# EAGLE board TSOC_PSoC4L_R0_0 (EAGLE 6.6.0)
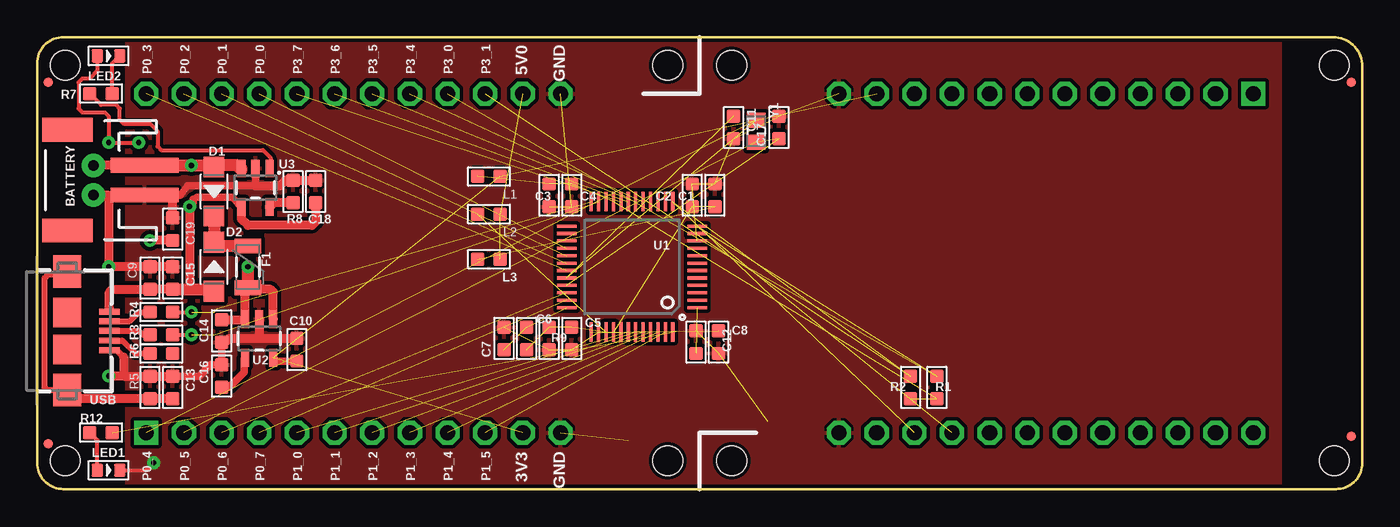
[diagram p0: board, top side]
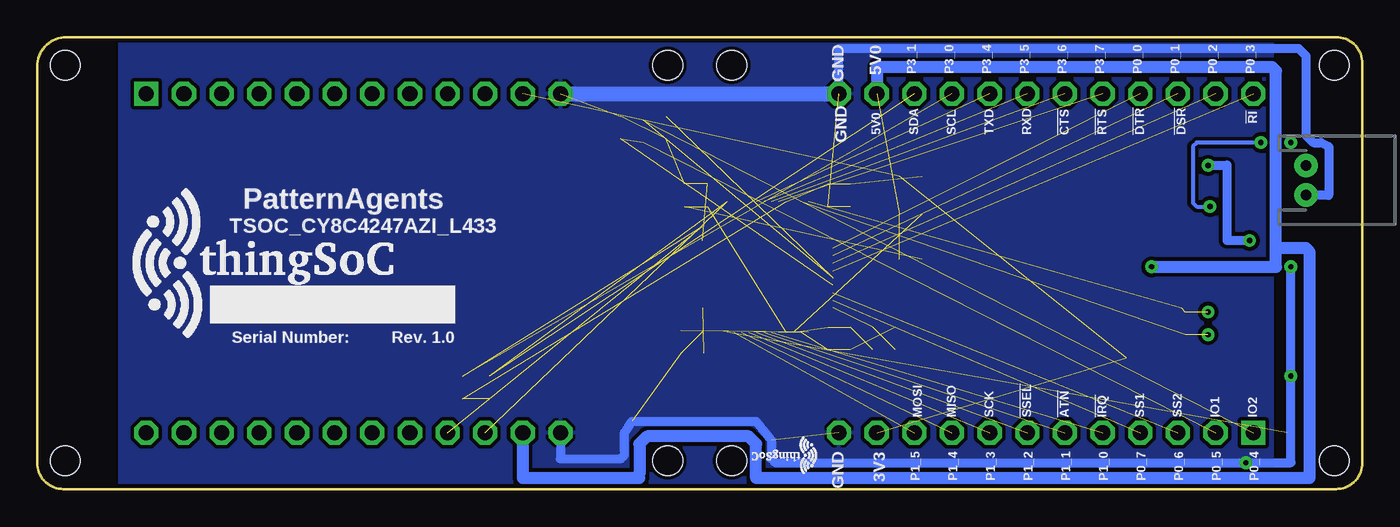
[diagram p1: board, bottom side, seen from below]

Size 89.41 x 30.48 mm. Coordinates in mm from the lower left corner, seen from the top.
Copper layers (1*16): Top 0.035mm / dielectric 1.5mm / Bottom 0.035mm
Design rules "PatternAgents_7mil": minimum track width 7mil, minimum drill 14mil, track to track 7mil, track to pad 7mil, pad to pad 7mil, via to via 7mil, smd to smd 7mil, copper to edge 7mil, drill to drill 7mil, minimum pad ring 12mil, minimum via ring 10mil, stop-mask expansion 4mil, vias tented up to drill 25mil, thermal gap 7mil
Net classes: 1 vcc: width 0.254 mm

## Footprints (pad centres in the part's own frame; a part is rotated, then mirrored left to right if it is on the bottom)
TSOC-BB-S24 = drill 1.016 square: 1B -11.43,11.43 | drill 1.016 octagon: 1C 11.43,11.43; 2B -11.43,8.89; 2C 11.43,8.89; 3B -11.43,6.35; 3C 11.43,6.35; 4B -11.43,3.81; 4C 11.43,3.81; 5B -11.43,1.27; 5C 11.43,1.27; 6B -11.43,-1.27; 6C 11.43,-1.27; 7B -11.43,-3.81; 7C 11.43,-3.81; 8B -11.43,-6.35; 8C 11.43,-6.35; 9B -11.43,-8.89; 9C 11.43,-8.89; 10B -11.43,-11.43; 10C 11.43,-11.43; 11B -11.43,-13.97; 11C 11.43,-13.97; 12B -11.43,-16.51; 12C 11.43,-16.51
JST-2-SMD = smd 1 x 4.6: 1 -1,-3.7; 2 1,-3.7 | smd 1.6 x 3.4: NC1 -3.4,1.5; NC2 3.4,1.5
C0603 = smd 0.889 x 0.889: 1 0,0.762; 2 0,-0.762
SOD-123 = smd 1.397 x 1.397: + -1.651,0; - 1.651,0
PTC-1206 = smd 1 x 1.8: 1 -1.4,0; 2 1.4,0
MICRO-FIDUCIAL = smd 0.635 x 0.635: 1 0,0
JST-2-PTH-NS = drill 0.7 pad 1.6: 1 -1,0; 2 1,0
L0603 = smd 0.889 x 0.889: 1 -0.762,0; 2 0.762,0
LED-0603 = smd 0.762 x 0.889: + -0.762,0; - 0.762,0
R0603 = smd 0.889 x 0.889: 1 0,0.762; 2 0,-0.762
TQFP-7X7-48 = smd 1.3 x 0.21: 1 -4.4,2.75; 2 -4.4,2.25; 3 -4.4,1.75; 4 -4.4,1.25; 5 -4.4,0.75; 6 -4.4,0.25; 7 -4.4,-0.25; 8 -4.4,-0.75; 9 -4.4,-1.25; 10 -4.4,-1.75; 11 -4.4,-2.25; 12 -4.4,-2.75; 25 4.4,-2.75; 26 4.4,-2.25; 27 4.4,-1.75; 28 4.4,-1.25; 29 4.4,-0.75; 30 4.4,-0.25; 31 4.4,0.25; 32 4.4,0.75; 33 4.4,1.25; 34 4.4,1.75; 35 4.4,2.25; 36 4.4,2.75 | smd 0.21 x 1.3: 13 -2.75,-4.4; 14 -2.25,-4.4; 15 -1.75,-4.4; 16 -1.25,-4.4; 17 -0.75,-4.4; 18 -0.25,-4.4; 19 0.25,-4.4; 20 0.75,-4.4; 21 1.25,-4.4; 22 1.75,-4.4; 23 2.25,-4.4; 24 2.75,-4.4; 37 2.75,4.4; 38 2.25,4.4; 39 1.75,4.4; 40 1.25,4.4; 41 0.75,4.4; 42 0.25,4.4; 43 -0.25,4.4; 44 -0.75,4.4; 45 -1.25,4.4; 46 -1.75,4.4; 47 -2.25,4.4; 48 -2.75,4.4
SOT23-5 = smd 0.55 x 1.2: 1 -0.95,-1.3; 2 0,-1.3; 3 0.95,-1.3; 4 0.95,1.3; 5 -0.95,1.3
TS0C-BB-BRD-DBL-DIM = hole 2: 13.335,16.891; -13.335,16.891; 13.335,-23.749; -13.335,-23.749; -13.335,21.209; 13.335,21.209; -13.335,61.849; 13.335,61.849
USB-AB-MICRO-SMD = smd 1.4 x 0.4: D+ 2.85,0; D- 2.85,0.65; GND 2.85,-1.3; ID 2.85,-0.65; VBUS 2.85,1.3 | smd 1.9 x 2: P$6 0,1.25; P$7 0,-1.25 | smd 1.9 x 2.2: SHIELD1 0,4; SHIELD2 0,-4
X2-SMD-L2.0X1.2X0.55MM = smd 1 x 1.25: 1 -0.75,0; 2 0.75,0

## Placement (x,y rotation side)
A  TSOC-24-BB  [TSOC-BB-S24]  18.8,15.24 90 top
B  TSOC-24-BB  [TSOC-BB-S24]  70.61,15.24 270 top
BATTERY  [JST-2-SMD]  3.56,20.83 90 top
C1  100nf  [C0603]  45.72,19.81 180 top
C2  1uf  [C0603]  44.2,19.81 180 top
C3  1uf  [C0603]  36.07,19.81 0 top
C4  100nf  [C0603]  34.54,19.81 0 top
C5  100nf  [C0603]  36.07,10.16 0 top
C6  1uf  [C0603]  34.54,10.16 0 top
C7  100nf  [C0603]  31.5,10.16 180 top
C8  1uf  [C0603]  45.97,9.91 0 top
C9  100nf  [C0603]  7.62,14.22 180 top
C10  10uf  [C0603]  17.53,9.4 0 top
C11  12pf  [C0603]  46.99,24.38 0 top
C12  1uf  [C0603]  44.45,9.91 180 top
C13  100nf  [C0603]  9.14,6.86 180 top
C14  100nf  [C0603]  12.45,7.62 180 top
C15  100nf  [C0603]  9.14,14.22 180 top
C16  10uf  [C0603]  12.45,10.67 0 top
C17  12pf  [C0603]  50.04,24.38 180 top
C18  1uf  [C0603]  18.8,20.07 180 top
C19  1uf  [C0603]  9.14,17.53 180 top
D1  20V-1A  [SOD-123]  11.94,20.07 270 top
D2  20V-1A  [SOD-123]  11.94,14.99 90 top
F1  500mA-PTC  [PTC-1206]  14.22,14.99 270 top
FID1  FIDUCIALUFIDUCIAL  [MICRO-FIDUCIAL]  88.65,27.43 180 top
FID2  FIDUCIALUFIDUCIAL  [MICRO-FIDUCIAL]  0.76,27.43 180 top
FID3  FIDUCIALUFIDUCIAL  [MICRO-FIDUCIAL]  88.65,3.56 180 top
FID4  FIDUCIALUFIDUCIAL  [MICRO-FIDUCIAL]  0.76,3.05 180 top
J1P  [JST-2-PTH-NS]  3.81,20.83 270 bottom
L1  330OHM-500MA  [L0603]  30.48,21.08 180 top
L2  330OHM-500MA  [L0603]  30.48,18.54 180 top
L3  330OHM-500MA  [L0603]  30.48,15.49 180 top
LED1  GREEN-0603  [LED-0603]  4.83,1.27 0 top
LED2  YELLOW-0603  [LED-0603]  4.83,29.21 0 top
R1  10K 1/10W  [R0603]  58.93,6.86 0 top
R2  10K 1/10W  [R0603]  60.71,6.86 0 top
R3  22R  [R0603]  8.38,10.41 90 top
R4  22R  [R0603]  8.38,11.94 90 top
R5  1M 1/10W  [R0603]  7.62,6.86 180 top
R6  22R  [R0603]  8.38,9.14 90 top
R7  1K 1/10W  [R0603]  4.32,26.67 90 top
R8  10K 1/10W  [R0603]  17.27,20.07 0 top
R9  10K 1/10W  [R0603]  33.02,10.16 0 top
R12  1K 1/10W  [R0603]  4.32,3.81 90 top
U1  CY8C4247AZI-L433  [TQFP-7X7-48]  40.13,14.99 180 top
U2  AP2112K-3.3V  [SOT23-5]  14.99,10.16 180 top
U3  MCP73831  [SOT23-5]  14.73,20.32 180 top
U$1  TSOC-PCB-DOUBLE  [TS0C-BB-BRD-DBL-DIM]  63.75,15.24 90 top
U$100  TSOC-LOGO-SMALL  [TSOC-LOGO-SML]  37.59,2.29 180 bottom
U$101  TSOC-LOGO-LRG  [TSOC-LOGO-LRG]  79.76,15.24 0 bottom
USB  USB_AB  [USB-AB-MICRO-SMD]  2.03,10.67 0 top
Y1  3.2768KHZ  [X2-SMD-L2.0X1.2X0.55MM]  48.51,24.13 270 top

## Library data of the parts
A B U$1 U$100 U$101 = thingSoC
BATTERY = TSOC-ESP8266-BASE; BTM_NEG: -; BTM_POS: +; PROD_ID: CONN-11443; TOP_NEG: -; TOP_POS: +
C1 C4 C5 C7 C9 C13-C15 = Seeed-Capacitor-2016; MPN: CC0603KRX7R9BB104
C2 C3 C6 C8 C12 C18 C19 = Seeed-Capacitor-2016; MPN: CC0603KRX7R8BB105
C10 C16 = Seeed-Capacitor-2016; MPN: CC0603KRX5R6BB106
C11 C17 = Seeed-Capacitor-2016; MPN: CC0603JRNPO9BN120
D1 D2 = Seeed-Diode-2016; MPN: B5819W
F1 = SparkFun
FID1-FID4 J1P = TSOC-ESP8266-BASE
L1-L3 = Seeed-Inductor-2016; MPN: BLM18AG121SN1D
LED1 = Seeed-LED-2016; MPN: 19-217-G7C-AN1P2-3T
LED2 = Seeed-LED-2016; MPN: 19-217-Y5C-AM1N1VY-3T
R1 R2 R8 R9 = Seeed-Resistor-2016; MPN: RC0603JR-0710KL
R3 R4 R6 = Seeed-Resistor-2016; MPN: RC0603JR-0722RL
R5 = Seeed-Resistor-2016; MPN: RC0603JR-071ML
R7 R12 = Seeed-Resistor-2016; MPN: RC0603JR-071KL
U1 = PatternAgents-Cypress
U2 = SparkFun-PowerIC; PROD_ID: VREG-12457
U3 = TSOC-ESP8266-BASE; PROD_ID: IC-09995
USB = BeeSafe
Y1 = Seeed-Crystal Oscillator-2016; MPN: FC-12M

## Nets
3V3: A.11B B.11B C10.2 L1.1 U2.5
5V0: A.11C B.11C C16.1 F1.2 L2.1 L3.1 U2.1 U2.3
!XRES: C7.1 R9.1 U1.36
BYPASS1: C14.1 U2.4
CLED: LED2.- R7.2
CSTAT: R7.1 U3.1
GND: A.12B A.12C B.12B B.12C BATTERY.1 C1.2 C2.2 C3.2 C4.2 C5.2 C6.2 C7.2 C8.2 C9.2 C10.1 C11.2 C12.2 C13.2 C14.2 C15.2 C16.2 C17.2 C18.2 C19.2 J1P.2 LED1.- R5.2 R8.1 U1.10 U1.38 U1.41 U2.2 U3.2 USB.GND
N$1: R8.2 U3.5
N$3: B.4C
N$4: B.8B
N$5: B.9B
N$6: B.10B
N$7: B.7B
N$8: B.3B
N$9: B.4B
N$10: B.1B
N$11: B.2B
N$12: B.5B
N$13: B.6B
N$14: B.5C
N$15: B.6C
N$16: B.8C
N$17: LED1.+ R12.1
N$18: B.7C
N$19: B.1C
N$20: B.2C
N$21: B.3C
P0_0: A.4C U1.28
P0_1: A.3C U1.29
P0_2: A.2C U1.30
P0_3: A.1C U1.31
P0_4: A.1B C11.1 U1.32 Y1.1
P0_5: A.2B C17.1 U1.33 Y1.2
P0_6: A.3B U1.34
P0_7: A.4B U1.35
P1_0: A.5B U1.42
P1_1: A.6B U1.43
P1_2: A.7B U1.44
P1_3: A.8B U1.45
P1_4: A.9B U1.46
P1_5: A.10B U1.47
P1_6: R12.2 U1.48
P1_7: C12.1 U1.1
P2_0: U1.2
P2_1: U1.3
P2_2: U1.4
P2_3: U1.5
P2_4: U1.6
P2_5: U1.7
P2_6: U1.8
P2_7: U1.9
P3_0: A.9C B.9C R2.1 U1.12
P3_1: A.10C B.10C R1.1 U1.13
P3_2: U1.14
P3_3: U1.16
P3_4: A.8C U1.17
P3_5: A.7C U1.18
P3_6: A.6C U1.19
P3_7: A.5C U1.20
P4_0: U1.22
P7_0: U1.26
P7_1: U1.27
USB1_DM: R4.2 U1.24
USB1_DP: R3.2 U1.23
USB1_I: R6.1 USB.ID
USB1_ID: R6.2
USB1_M: R4.1 USB.D-
USB1_P: R3.1 USB.D+
USB1_SHIELD: C13.1 R5.1 USB.SHIELD1 USB.SHIELD2
USB1_VBUS: U1.25
VBAT: BATTERY.2 C19.1 D1.+ J1P.1 U3.3
VBUS: C9.1 C15.1 C18.1 D2.+ LED2.+ U3.4 USB.VBUS
VCCD: C8.1 U1.37
VDDA: C1.1 C2.1 L3.2 U1.40
VDDD: C5.1 C6.1 L2.2 R9.2 U1.39
VDDIO: C3.1 C4.1 L1.2 R1.2 R2.2 U1.21
VIN: D1.- D2.- F1.1

## Tracks (layer width: path | path; a pad name or v marks a point on that pad's centre or on a via)
3V3  (3 unrouted)
  Top 0.508: C10.2 16.16,8.64 U2.5
5V0  (via drill 0.36)  (2 unrouted)
  Top 0.61: C16.1 14.01,11.43 U2.3 14.04,13.4 F1.2 14.35,13.46 15.75,13.46 15.94,13.27 U2.1
  Top 0.813: F1.2 v14.22,14.99
  Bottom 0.813: v14.22,14.99 5.84,14.99 5.84,16.26 | 5.84,16.26 5.84,28.19 6.1,28.45 32.77,28.45 A.11C | B.11C 56.64,0.76 49.02,0.76 | 49.02,0.76 48.77,0.76 | 49.02,0.76 48.77,1.02 48.77,3.05 48.26,3.56 41.4,3.56 40.89,3.05 40.89,0.76 3.56,0.76 3.56,16 3.81,16.26 5.84,16.26
!XRES  (2 unrouted)
BYPASS1
  Top 0.508: C14.1 12.95,6.86 13.97,7.87 13.97,8.79 U2.4
CLED
  Top 0.254: R7.2 5.08,28.7 LED2.-
CSTAT
  Top 0.254: U3.1 15.75,21.69 15.75,22.35 15.24,22.86 8.38,22.86 8.13,23.11 8.13,24.13 7.62,24.64 5.84,24.64 5.59,24.89 5.59,25.65 5.33,25.91 4.32,25.91 R7.1
GND  (via drill 0.36)  (15 unrouted)
  Top 0.254: LED1.- 7.37,1.27 v7.87,1.78
  Top 0.406: USB.GND 5.36,9.37 5.84,8.89
  Top 0.508: U3.2 14.73,20.45 10.16,20.45 9.65,19.81 9.14,19.81 | C16.2 C14.2 11.68,8.38 10.92,7.62 C13.2
  Top 0.61: 5.84,8.89 5.84,7.62 | C13.2 R5.2 5.84,7.62 | C9.2 C15.2 v4.83,14.99 4.83,19.81 | C19.2 9.14,19.81 7.27,19.81 BATTERY.1 7.24,19.81 4.83,19.81 | 14.73,20.45 16.38,20.45 16.76,20.83 R8.1 C18.2 | 4.83,19.81 3.83,19.81 J1P.2 | 5.84,7.62 v4.83,7.62 | C16.2 12.7,9.91 12.95,10.16 14.99,10.16 | U2.2 14.99,10.16 | 14.99,10.16 C10.1
  Bottom 0.61: 3.83,19.81 J1P.2 3.79,19.81 2.29,19.81 2.29,23.11 2.79,23.37 3.3,23.37 3.81,23.88 3.81,29.21 4.32,29.72 35.31,29.72 A.12C | B.12C 54.1,2.03 50.04,2.03 49.78,2.29 49.78,3.81 49.28,4.57 40.89,4.57 39.88,3.3 39.88,2.03 39.62,1.78 v7.87,1.78 4.83,1.78 v4.83,7.62 v4.83,14.99
  Bottom 1.016: B.12B A.12C
  pour Top (isolate 0.254, hatched): 83.82,30.48 83.82,0 6.1,0 6.1,30.48
  pour Bottom (isolate 0.254, hatched): 83.82,30.48 83.82,0 6.1,0 6.1,30.48
N$1
  Top 0.61: R8.2 15.97,19.3 U3.5
N$17
  Top 0.254: LED1.+ 4.06,3.3 R12.1
P0_0  (1 unrouted)
P0_1  (1 unrouted)
P0_2  (1 unrouted)
P0_3  (1 unrouted)
P0_4  (3 unrouted)
P0_5  (3 unrouted)
P0_6  (1 unrouted)
P0_7  (1 unrouted)
P1_0  (1 unrouted)
P1_1  (1 unrouted)
P1_2  (1 unrouted)
P1_3  (1 unrouted)
P1_4  (1 unrouted)
P1_5  (1 unrouted)
P1_6  (1 unrouted)
P1_7  (1 unrouted)
P3_0  (3 unrouted)
P3_1  (3 unrouted)
P3_4  (1 unrouted)
P3_5  (1 unrouted)
P3_6  (1 unrouted)
P3_7  (1 unrouted)
USB1_DM  (via drill 0.36)  (3 unrouted)
  Top 0.254: R4.2 v10.41,11.94
USB1_DP  (via drill 0.36)  (2 unrouted)
  Top 0.254: R3.2 v10.41,10.41
USB1_I
  Top 0.406: USB.ID 5.73,10.02 6.6,9.14 R6.1
USB1_M
  Top 0.406: USB.D- 6.24,11.32 6.86,11.94 R4.1
USB1_P
  Top 0.406: USB.D+ 6.86,10.67 7.11,10.41 R3.1
USB1_SHIELD
  Top 0.406: USB.SHIELD2 0.7,6.67 0.51,6.86 0.51,14.22 0.76,14.48 1.84,14.48
  Top 0.61: C13.1 R5.1 2.6,6.1 USB.SHIELD2 | 1.84,14.48 USB.SHIELD1
VBAT  (via drill 0.36)
  Top 0.61: C19.1 v7.62,16.76 | BATTERY.2 J1P.1
  Top 0.813: BATTERY.2 v10.41,21.83 11.57,21.83 D1.+ 11.81,21.84 13.46,21.84 13.78,21.52 U3.3
  Bottom 0.61: v10.41,21.83 9.16,21.83 9.14,21.84 C19.1 v7.62,16.76
VBUS  (via drill 0.36)
  Top 0.254: v6.86,23.37 v4.83,23.37 4.83,25.15 4.57,25.4 3.05,25.4 2.79,25.65 2.79,27.43 3.05,27.69 3.56,27.69 4.06,28.19 LED2.+
  Top 0.406: USB.VBUS 4.88,12.19
  Top 0.508: U3.4 13.75,19.02 13.21,19.68 10.79,19.68 10.54,19.56 10.54,19.3 v10.29,19.05
  Top 0.61: C15.1 C9.1 5.08,13.46 4.88,13.26 4.88,12.19 | C18.1 18.8,18.03 18.54,17.78 14.22,17.78 13.78,18.22 U3.4 | v10.29,19.05 10.29,13.59 10.41,13.46
  Top 0.813: C15.1 10.41,13.46 11.81,13.46 D2.+
  Bottom 0.254: v10.29,19.05 11.18,19.05 11.43,19.3 11.43,23.11 11.18,23.37 v6.86,23.37
VCCD  (1 unrouted)
VDDA  (3 unrouted)
VDDD  (4 unrouted)
VDDIO  (5 unrouted)
VIN
  Top 0.813: D1.- D2.- 12.19,16.39 F1.1

## Text on the board
tPlace: P0_3 | P0_2 | P0_1 | P0_0 | P3_7 | P3_6 | P3_5 | P3_4 | P3_0 | P3_1 | 5V0 | GND | P0_4 | P0_5 | P0_6 | P0_7 | P1_0 | P1_1 | P1_2 | P1_3 | P1_4 | P1_5 | 3V3 | GND
bPlace: P0_3 | P0_2 | P0_1 | P0_0 | P3_7 | P3_6 | P3_5 | P3_4 | P3_0 | P3_1 | 5V0 | GND | !RI | !DSR | !DTR | !RTS | !CTS | RXD | TXD | SCL | SDA | 5V0 | GND | PatternAgents | TSOC_CY8C4247AZI_L433 | Rev. 1.0 | Serial Number: | IO2 | IO1 | SS2 | SS1 | !IRQ | !ATN | !SSEL | SCK | MISO | MOSI | P0_4 | P0_5 | P0_6 | P0_7 | P1_0 | P1_1 | P1_2 | P1_3 | P1_4 | P1_5 | 3V3 | GND